# Altium PCB Cell Protection Board.PcbDoc
Units mm, origin at the board's own origin, x right, y up, seen from the top; angles counter-clockwise.
Board outline 55 x 160 mm, 2 copper layers (Top Layer, Bottom Layer); 73 components, 79 nets, 249 pads, 64 vias.
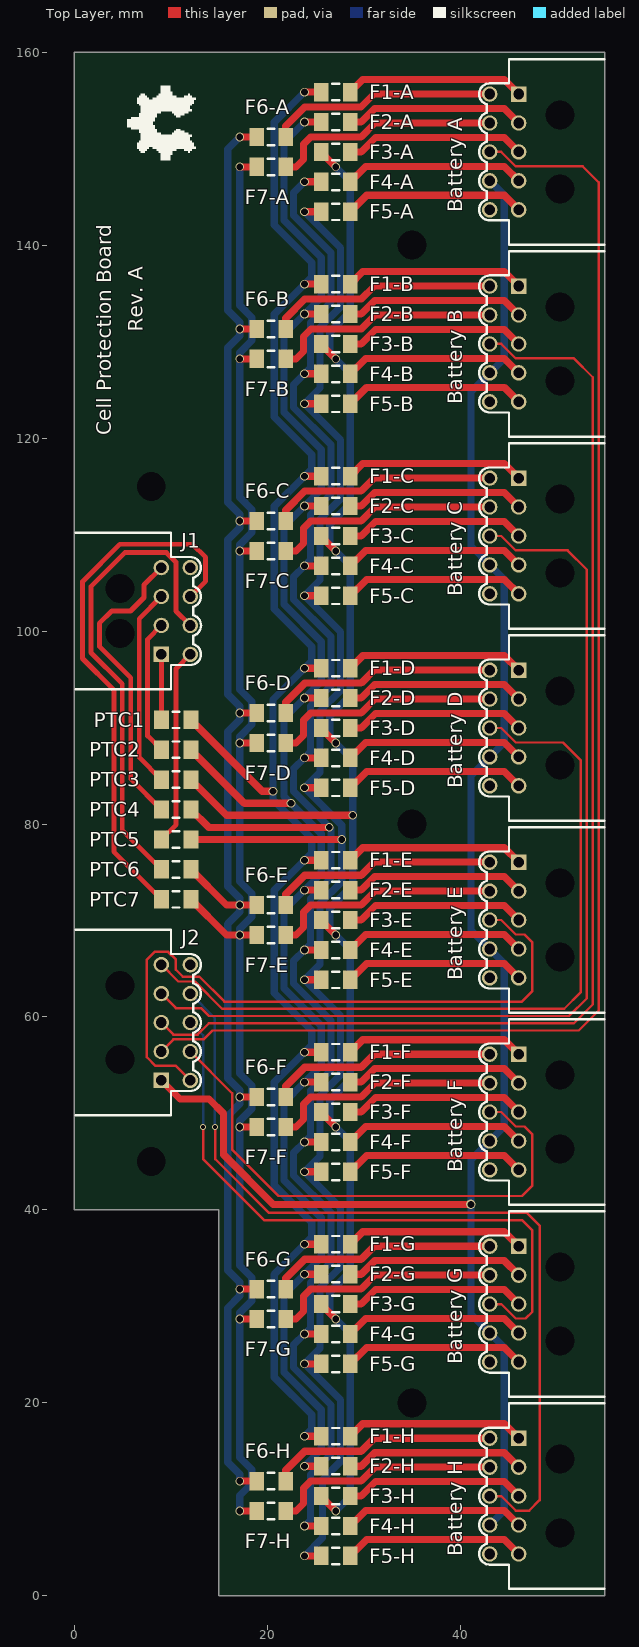
[diagram p0: Top Layer view]
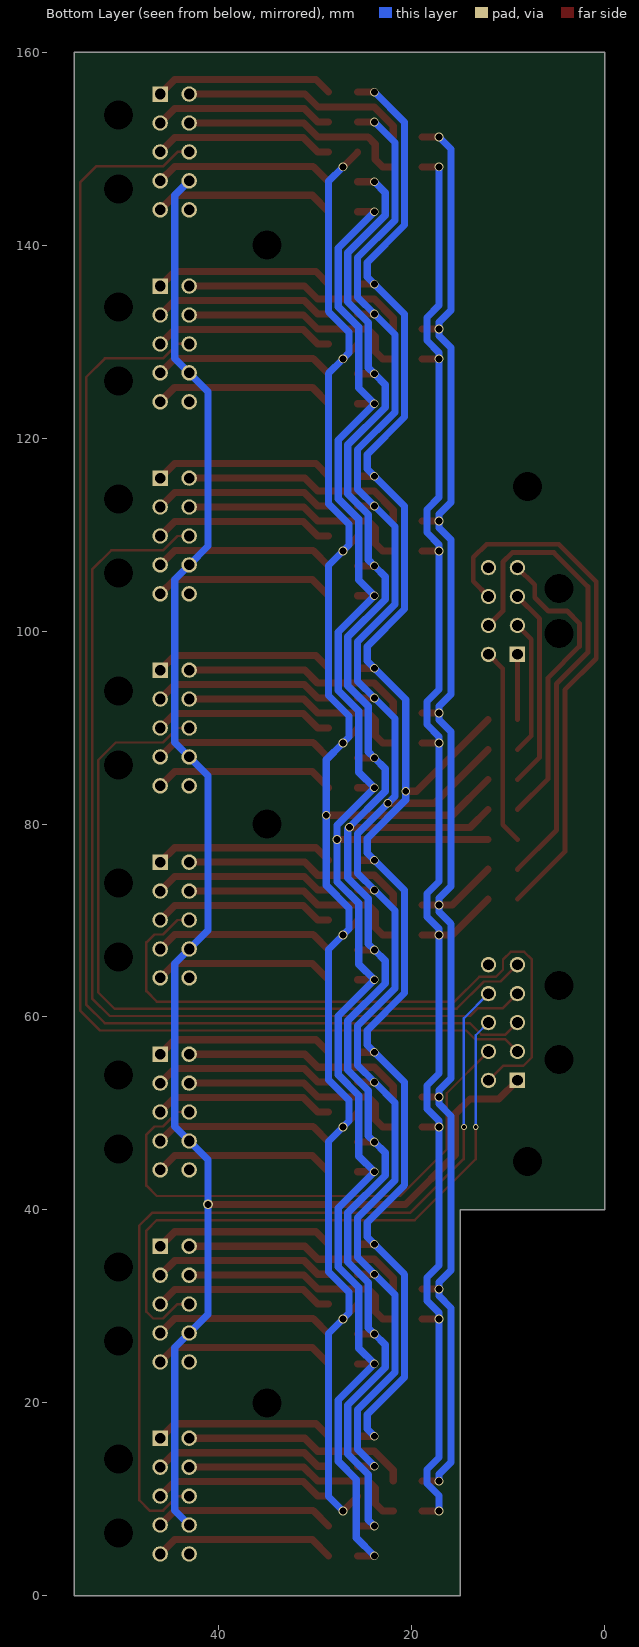
[diagram p1: Bottom Layer view, seen from below]

## Layer stack, top to bottom
Top Solder: solder mask 0.0102, Solder Resist, Dk 3.5
Top Layer: signal copper 0.0356
Dielectric 1: dielectric 0.32, FR-4, Dk 4.8
Bottom Layer: signal copper 0.0356
Bottom Solder: solder mask 0.0102, Solder Resist, Dk 3.5

## Board outline
0,40 15,40 15,0 55,0 55,160 0,160

## Design rules (kind name [scope] priority, off if disabled: settings)
Clearance [All] p1: gap=0.2
HoleSize [All] p1: absolutevalues=TRUE maxlimit=3 minlimit=0.025 maxpercent=80.000 minpercent=20.000
PolygonConnect [All] p1: connectstyle=Relief reliefconductorwidth=0.254 reliefentries=4 polygonreliefangle="90 Angle" airgapwidth=0.254
RoutingCorners [All] p1: cornerstyle=45-Degree minsetback=2.5 maxsetback=2.5
RoutingVias [All] p1: holewidth=0.4 width=0.6 viastyle="Through Hole" minholewidth=0.4 minwidth=0.6 maxholewidth=0.8 maxwidth=1
SilkToSolderMaskClearance [IsPad] p1: minsilkscreentomaskgap=0.15 clearancetoexposedcopper=TRUE
SolderMaskExpansion [All] p1: expansion=0.102
UnpouredPolygon [All] p1: allowunpoured=FALSE
Width [All] p1: maxlimit=0.75 minlimit=0.25 preferedwidth=0.25 minimp=50.000000 maximp=50.000000 favimp=50.000000
26 further rules are at their usual default settings.

## Components (designator, comment, footprint, x,y, rotation, side; value= is the part's Value field where it differs from the comment)
"Battery A" "Molex Micro-Fit 43045-1000" "MOLEX MICRO-FIT 43045-1000" 50.375,149.65 r90 top locked
"Battery B" "Molex Micro-Fit 43045-1000" "MOLEX MICRO-FIT 43045-1000" 50.375,129.75 r90 top locked
"Battery C" "Molex Micro-Fit 43045-1000" "MOLEX MICRO-FIT 43045-1000" 50.375,109.85 r90 top locked
"Battery D" "Molex Micro-Fit 43045-1000" "MOLEX MICRO-FIT 43045-1000" 50.375,89.95 r90 top locked
"Battery E" "Molex Micro-Fit 43045-1000" "MOLEX MICRO-FIT 43045-1000" 50.375,70.05 r90 top locked
"Battery F" "Molex Micro-Fit 43045-1000" "MOLEX MICRO-FIT 43045-1000" 50.375,50.15 r90 top locked
"Battery G" "Molex Micro-Fit 43045-1000" "MOLEX MICRO-FIT 43045-1000" 50.375,30.25 r90 top locked
"Battery H" "Molex Micro-Fit 43045-1000" "MOLEX MICRO-FIT 43045-1000" 50.375,10.35 r90 top locked
F1-A "" "Bel Fuse C1T Series (3216)" 27.125,155.85 r180 top locked
F1-B "" "Bel Fuse C1T Series (3216)" 27.125,135.95 r180 top locked
F1-C "" "Bel Fuse C1T Series (3216)" 27.125,116.05 r180 top locked
F1-D "" "Bel Fuse C1T Series (3216)" 27.125,96.15 r180 top locked
F1-E "" "Bel Fuse C1T Series (3216)" 27.125,76.25 r180 top locked
F1-F "" "Bel Fuse C1T Series (3216)" 27.125,56.35 r180 top locked
F1-G "" "Bel Fuse C1T Series (3216)" 27.125,36.45 r180 top locked
F1-H "" "Bel Fuse C1T Series (3216)" 27.125,16.55 r180 top locked
F2-A "" "Bel Fuse C1T Series (3216)" 27.125,152.75 r180 top locked
F2-B "" "Bel Fuse C1T Series (3216)" 27.125,132.85 r180 top locked
F2-C "" "Bel Fuse C1T Series (3216)" 27.125,112.95 r180 top locked
F2-D "" "Bel Fuse C1T Series (3216)" 27.125,93.05 r180 top locked
F2-E "" "Bel Fuse C1T Series (3216)" 27.125,73.15 r180 top locked
F2-F "" "Bel Fuse C1T Series (3216)" 27.125,53.25 r180 top locked
F2-G "" "Bel Fuse C1T Series (3216)" 27.125,33.35 r180 top locked
F2-H "" "Bel Fuse C1T Series (3216)" 27.125,13.45 r180 top locked
F3-A "" "Bel Fuse C1T Series (3216)" 27.125,149.65 r180 top locked
F3-B "" "Bel Fuse C1T Series (3216)" 27.125,129.75 r180 top locked
F3-C "" "Bel Fuse C1T Series (3216)" 27.125,109.85 r180 top locked
F3-D "" "Bel Fuse C1T Series (3216)" 27.125,89.95 r180 top locked
F3-E "" "Bel Fuse C1T Series (3216)" 27.125,70.05 r180 top locked
F3-F "" "Bel Fuse C1T Series (3216)" 27.125,50.15 r180 top locked
F3-G "" "Bel Fuse C1T Series (3216)" 27.125,30.25 r180 top locked
F3-H "" "Bel Fuse C1T Series (3216)" 27.125,10.35 r180 top locked
F4-A "" "Bel Fuse C1T Series (3216)" 27.125,146.55 r180 top locked
F4-B "" "Bel Fuse C1T Series (3216)" 27.125,126.65 r180 top locked
F4-C "" "Bel Fuse C1T Series (3216)" 27.125,106.75 r180 top locked
F4-D "" "Bel Fuse C1T Series (3216)" 27.125,86.85 r180 top locked
F4-E "" "Bel Fuse C1T Series (3216)" 27.125,66.95 r180 top locked
F4-F "" "Bel Fuse C1T Series (3216)" 27.125,47.05 r180 top locked
F4-G "" "Bel Fuse C1T Series (3216)" 27.125,27.15 r180 top locked
F4-H "" "Bel Fuse C1T Series (3216)" 27.125,7.25 r180 top locked
F5-A "" "Bel Fuse C1T Series (3216)" 27.125,143.45 r180 top locked
F5-B "" "Bel Fuse C1T Series (3216)" 27.125,123.55 r180 top locked
F5-C "" "Bel Fuse C1T Series (3216)" 27.125,103.65 r180 top locked
F5-D "" "Bel Fuse C1T Series (3216)" 27.125,83.75 r180 top locked
F5-E "" "Bel Fuse C1T Series (3216)" 27.125,63.85 r180 top locked
F5-F "" "Bel Fuse C1T Series (3216)" 27.125,43.95 r180 top locked
F5-G "" "Bel Fuse C1T Series (3216)" 27.125,24.05 r180 top locked
F5-H "" "Bel Fuse C1T Series (3216)" 27.125,4.15 r180 top locked
F6-A "" "Bel Fuse C1T Series (3216)" 20.425,151.2 r180 top locked
F6-B "" "Bel Fuse C1T Series (3216)" 20.425,131.3 r180 top locked
F6-C "" "Bel Fuse C1T Series (3216)" 20.425,111.4 r180 top locked
F6-D "" "Bel Fuse C1T Series (3216)" 20.425,91.5 r180 top locked
F6-E "" "Bel Fuse C1T Series (3216)" 20.425,71.6 r180 top locked
F6-F "" "Bel Fuse C1T Series (3216)" 20.425,51.7 r180 top locked
F6-G "" "Bel Fuse C1T Series (3216)" 20.425,31.8 r180 top locked
F6-H "" "Bel Fuse C1T Series (3216)" 20.425,11.9 r180 top locked
F7-A "" "Bel Fuse C1T Series (3216)" 20.425,148.1 r180 top locked
F7-B "" "Bel Fuse C1T Series (3216)" 20.425,128.2 r180 top locked
F7-C "" "Bel Fuse C1T Series (3216)" 20.425,108.3 r180 top locked
F7-D "" "Bel Fuse C1T Series (3216)" 20.425,88.4 r180 top locked
F7-E "" "Bel Fuse C1T Series (3216)" 20.425,68.5 r180 top locked
F7-F "" "Bel Fuse C1T Series (3216)" 20.425,48.6 r180 top locked
F7-G "" "Bel Fuse C1T Series (3216)" 20.425,28.7 r180 top locked
F7-H "" "Bel Fuse C1T Series (3216)" 20.425,8.8 r180 top locked
J1 "Molex Micro-Fit 43045-0800" "Molex Micro-Fit 43045-0800" 4.75,102.075 r270 top locked
J2 "Molex Micro-Fit 43045-1000" "MOLEX MICRO-FIT 43045-1000" 4.75,59.425 r270 top locked
PTC1 "" "Bel Fuse 0ZCJ Series (3216)" 10.575,90.8 r180 top locked
PTC2 "" "Bel Fuse 0ZCJ Series (3216)" 10.575,87.7 r180 top locked
PTC3 "" "Bel Fuse 0ZCJ Series (3216)" 10.575,84.6 r180 top locked
PTC4 "" "Bel Fuse 0ZCJ Series (3216)" 10.575,81.5 r180 top locked
PTC5 "" "Bel Fuse 0ZCJ Series (3216)" 10.575,78.4 r180 top locked
PTC6 "" "Bel Fuse 0ZCJ Series (3216)" 10.575,75.3 r180 top locked
PTC7 "" "Bel Fuse 0ZCJ Series (3216)" 10.575,72.2 r180 top locked

## Footprints (in the part's own frame and the unit in brackets; to place one, negate y for a bottom-side part, rotate by r counter-clockwise, add the part's x,y. Pads: shape width x height; smd on the part's side, far side on the other; paste and mask are expansions set on the pad)
"Bel Fuse 0ZCJ Series (3216)" [mm] "PTC Fuse"
  rect 1.55x1.9 smd: 1(-1.525,0) 2(1.525,0)
  silkscreen extent -0.35,-0.85 0.35,0.85, body extent -1.75,-0.9 1.75,0.9, height 0.85
"Bel Fuse C1T Series (3216)" [mm] "Slow Blow Chip Fuse"
  rect 1.5x1.9 smd: 1(-1.5,0) 2(1.5,0)
  silkscreen extent -0.35,-0.85 0.35,0.85, body extent -1.7,-0.89 1.7,0.89, height 0.83
"Molex Micro-Fit 43045-0800" [mm] "8-Pin Right-Angle Locking Male Header"
  rect 1.6x1.6 hole 1.1: 1(4.5,4.3)
  round 1.6 hole 1.1: 2(1.5,4.3) 3(-1.5,4.3) 4(-4.5,4.3) 5(4.5,7.3) 6(1.5,7.3) 7(-1.5,7.3) 8(-4.5,7.3)
  round 0 hole 3: ""(-2.35,0) ""(2.35,0)
  silkscreen extent -8.1,-4.6 8.1,8.41, body extent -8.08,-4.64 8.08,7.6, height 8.73
"MOLEX MICRO-FIT 43045-1000" [mm] "10-Pin Right-Angle Locking Male Header"
  rect 1.6x1.6 hole 1.1: 1(6,4.3)
  round 1.6 hole 1.1: 2(3,4.3) 3(0,4.3) 4(-3,4.3) 5(-6,4.3) 6(6,7.3) 7(3,7.3) 8(0,7.3) 9(-3,7.3) 10(-6,7.3)
  round 0 hole 3: ""(-3.85,0) ""(3.85,0)
  silkscreen extent -9.6,-4.6 9.6,8.4, body extent -9.57,-4.65 9.58,7.59, height 8.73

## Part data
"Battery A" "Battery B" "Battery C" "Battery D" "Battery E" "Battery F" "Battery G" "Battery H" J2: "10-Pin Right-Angle Locking Male Header"
F1-A F1-B F1-C F1-D F1-E F1-F F1-G F1-H F2-A F2-B F2-C F2-D F2-E F2-F F2-G F2-H F3-A F3-B F3-C F3-D F3-E F3-F F3-G F3-H F4-A F4-B F4-C F4-D F4-E F4-F F4-G F4-H F5-A F5-B F5-C F5-D F5-E F5-F F5-G F5-H F6-A F6-B F6-C F6-D F6-E F6-F F6-G F6-H F7-A F7-B F7-C F7-D F7-E F7-F F7-G F7-H PTC1 PTC2 PTC3 PTC4 PTC5 PTC6 PTC7: library part "Fuse 1", "Fuse"
J1: "8-Pin Right-Angle Locking Male Header"

## Free pads (board coordinates)
  round 0 hole 3: ""(8,45) ""(8,115) ""(35,20) ""(35,80) ""(35,140)

## Via types
v1: diameter 0.9, hole 0.7, Top Layer to Bottom Layer, tented both sides, 61 vias
v2: diameter 0.6, hole 0.4, Top Layer to Bottom Layer, tented both sides, 2 vias
v3: diameter 1, hole 0.7, Top Layer to Bottom Layer, tented both sides, 1 vias

## Nets (pads, with @x,y where several pads share a name; then routed paths per layer and width w, separated by ;. In a path a pad name is that pad's centre, name@x,y a point inside that pad or via, vN(x,y) a via of type N, cw(c..) or ccw(c..) an arc to the next point about the centre after c; other vN are vias at no path point)
"NetBattery A_1": "Battery A.1" F1-A.1 | length 18.6
  Top Layer w0.75: F1-A.1 29.925,157.15 44.575,157.15 46.075,155.65
"NetBattery A_2": "Battery A.2" F2-A.1 | length 18.7
  Top Layer w0.75: F2-A.1 29.75,152.75 31.15,154.15 44.575,154.15 46.075,152.65
"NetBattery A_3": "Battery A.3" F3-A.1 | length 18.7
  Top Layer w0.75: F3-A.1 29.75,149.65 31.25,151.15 44.575,151.15 46.075,149.65
"NetBattery A_4": "Battery A.4" F4-A.1 | length 18.7
  Top Layer w0.75: F4-A.1 30.225,148.15 44.575,148.15 46.075,146.65
"NetBattery A_5": "Battery A.5" F5-A.1 | length 18.8
  Top Layer w0.75: F5-A.1 30.325,145.15 44.575,145.15 46.075,143.65
"NetBattery A_6": "Battery A.6" F6-A.1 | length 23.7
  Top Layer w0.75: F6-A.1 21.925,152.325 23.9,154.3 29.725,154.3 31.075,155.65 43.075,155.65
"NetBattery A_7": "Battery A.7" F7-A.1 | length 24
  Top Layer w0.75: F7-A.1 23,148.1 23.775,148.875 23.775,150.45 24.525,151.2 29.75,151.2 31.2,152.65 43.075,152.65
"NetBattery A_8": "Battery A.8" J2.2 | length 145.5
  Top Layer w0.25: J2.2 10.3,57.675 13.425,57.675 14.35,58.6 52.3,58.6 54.375,60.675 54.375,146.5 52.725,148.15 45.775,148.15 44.275,149.65 43.075,149.65
"NetBattery A_9": "Battery A.9" "Battery B.9" "Battery C.9" "Battery D.9" "Battery E.9" "Battery F.9" "Battery G.9" "Battery H.9" J2.1 | length 189
  Top Layer w0.75: J2.1 10.975,51.5 13.975,51.5 15.5,49.975 15.5,45.725 20.65,40.575 v3(41.125,40.575)
  Bottom Layer w0.75: 43.075,7.35 44.575,8.85 44.575,25.75 43.075,27.25 41.125,29.2 41.125,40.55 41.125,45.2 43.075,47.15 44.575,48.65 44.575,65.55 43.075,67.05 41.125,69 41.125,85 43.075,86.95 44.575,88.45 44.575,105.35 43.075,106.85 41.125,108.8 41.125,124.8 43.075,126.75 44.575,128.25 44.575,145.15 43.075,146.65
"NetBattery B_1": "Battery B.1" F1-B.1 | length 18.6
  Top Layer w0.75: F1-B.1 29.925,137.25 44.575,137.25 46.075,135.75
"NetBattery B_2": "Battery B.2" F2-B.1 | length 18.7
  Top Layer w0.75: F2-B.1 29.75,132.85 31.15,134.25 44.575,134.25 46.075,132.75
"NetBattery B_3": "Battery B.3" F3-B.1 | length 18.7
  Top Layer w0.75: F3-B.1 29.75,129.75 31.25,131.25 44.575,131.25 46.075,129.75
"NetBattery B_4": "Battery B.4" F4-B.1 | length 18.7
  Top Layer w0.75: F4-B.1 30.225,128.25 44.575,128.25 46.075,126.75
"NetBattery B_5": "Battery B.5" F5-B.1 | length 18.8
  Top Layer w0.75: F5-B.1 30.325,125.25 44.575,125.25 46.075,123.75
"NetBattery B_6": "Battery B.6" F6-B.1 | length 23.7
  Top Layer w0.75: F6-B.1 21.925,132.425 23.9,134.4 29.775,134.4 31.125,135.75 43.075,135.75
"NetBattery B_7": "Battery B.7" F7-B.1 | length 23.9
  Top Layer w0.75: F7-B.1 23,128.2 23.775,128.975 23.775,130.525 24.55,131.3 29.775,131.3 31.225,132.75 43.075,132.75
"NetBattery B_8": "Battery B.8" J2.3 | length 123.6
  Top Layer w0.25: J2.3 10.3,58.175 12.8,58.175 13.975,59.35 51.8,59.35 53.75,61.3 53.75,126.3 51.8,128.25 45.775,128.25 44.275,129.75 43.075,129.75
"NetBattery C_1": "Battery C.1" F1-C.1 | length 18.6
  Top Layer w0.75: F1-C.1 29.925,117.35 44.575,117.35 46.075,115.85
"NetBattery C_2": "Battery C.2" F2-C.1 | length 18.7
  Top Layer w0.75: F2-C.1 29.75,112.95 31.15,114.35 44.575,114.35 46.075,112.85
"NetBattery C_3": "Battery C.3" F3-C.1 | length 18.7
  Top Layer w0.75: F3-C.1 29.75,109.85 31.25,111.35 44.575,111.35 46.075,109.85
"NetBattery C_4": "Battery C.4" F4-C.1 | length 18.7
  Top Layer w0.75: F4-C.1 30.225,108.35 44.575,108.35 46.075,106.85
"NetBattery C_5": "Battery C.5" F5-C.1 | length 18.8
  Top Layer w0.75: F5-C.1 30.325,105.35 44.575,105.35 46.075,103.85
"NetBattery C_6": "Battery C.6" F6-C.1 | length 23.7
  Top Layer w0.75: F6-C.1 21.925,112.525 23.9,114.5 29.75,114.5 31.1,115.85 43.075,115.85
"NetBattery C_7": "Battery C.7" F7-C.1 | length 24
  Top Layer w0.75: F7-C.1 23,108.3 23.775,109.075 23.775,110.65 24.525,111.4 29.75,111.4 31.2,112.85 43.075,112.85
"NetBattery C_8": "Battery C.8" J2.4 | length 101.7
  Top Layer w0.25: J2.4 10.55,60.925 13.15,60.925 13.975,60.1 51.3,60.1 53.125,61.925 53.125,106.375 51.15,108.35 45.775,108.35 44.275,109.85 43.075,109.85
"NetBattery D_1": "Battery D.1" F1-D.1 | length 18.6
  Top Layer w0.75: F1-D.1 29.925,97.45 44.575,97.45 46.075,95.95
"NetBattery D_2": "Battery D.2" F2-D.1 | length 18.7
  Top Layer w0.75: F2-D.1 29.75,93.05 31.15,94.45 44.575,94.45 46.075,92.95
"NetBattery D_3": "Battery D.3" F3-D.1 | length 18.7
  Top Layer w0.75: F3-D.1 29.75,89.95 31.25,91.45 44.575,91.45 46.075,89.95
"NetBattery D_4": "Battery D.4" F4-D.1 | length 18.7
  Top Layer w0.75: F4-D.1 30.225,88.45 44.575,88.45 46.075,86.95
"NetBattery D_5": "Battery D.5" F5-D.1 | length 18.8
  Top Layer w0.75: F5-D.1 30.325,85.45 44.575,85.45 46.075,83.95
"NetBattery D_6": "Battery D.6" F6-D.1 | length 23.7
  Top Layer w0.75: F6-D.1 21.925,92.625 23.9,94.6 29.75,94.6 31.1,95.95 43.075,95.95
"NetBattery D_7": "Battery D.7" F7-D.1 | length 24
  Top Layer w0.75: F7-D.1 23,88.4 23.775,89.175 23.775,90.75 24.525,91.5 29.75,91.5 31.2,92.95 43.075,92.95
"NetBattery D_8": "Battery D.8" J2.5 | length 80.9
  Top Layer w0.25: J2.5 10.8,63.675 12.525,63.675 15.35,60.85 50.8,60.85 52.5,62.55 52.5,86.627 50.677,88.45 45.775,88.45 44.275,89.95 43.075,89.95
"NetBattery E_1": "Battery E.1" F1-E.1 | length 18.6
  Top Layer w0.75: F1-E.1 29.925,77.55 44.575,77.55 46.075,76.05
"NetBattery E_2": "Battery E.2" F2-E.1 | length 18.7
  Top Layer w0.75: F2-E.1 29.75,73.15 31.15,74.55 44.575,74.55 46.075,73.05
"NetBattery E_3": "Battery E.3" F3-E.1 | length 18.7
  Top Layer w0.75: F3-E.1 29.75,70.05 31.25,71.55 44.575,71.55 46.075,70.05
"NetBattery E_4": "Battery E.4" F4-E.1 | length 18.7
  Top Layer w0.75: F4-E.1 30.225,68.55 44.575,68.55 46.075,67.05
"NetBattery E_5": "Battery E.5" F5-E.1 | length 18.8
  Top Layer w0.75: F5-E.1 30.325,65.55 44.575,65.55 46.075,64.05
"NetBattery E_6": "Battery E.6" F6-E.1 | length 23.7
  Top Layer w0.75: F6-E.1 21.925,72.725 23.9,74.7 29.75,74.7 31.1,76.05 43.075,76.05
"NetBattery E_7": "Battery E.7" F7-E.1 | length 24
  Top Layer w0.75: F7-E.1 23,68.5 23.775,69.275 23.775,70.85 24.525,71.6 29.75,71.6 31.2,73.05 43.075,73.05
"NetBattery E_8": "Battery E.8" J2.6 | length 69.5
  Top Layer w0.25: J2.6 10.55,54.925 8.45,54.925 7.55,55.825 7.55,65.95 8.35,66.75 9.75,66.75 10.55,65.95 10.55,64.9 11.275,64.175 13,64.175 15.575,61.6 46.425,61.6 47.5,62.675 47.5,67.725 46.675,68.55 45.775,68.55 44.275,70.05 43.075,70.05
"NetBattery F_1": "Battery F.1" F1-F.1 | length 18.6
  Top Layer w0.75: F1-F.1 29.925,57.65 44.575,57.65 46.075,56.15
"NetBattery F_2": "Battery F.2" F2-F.1 | length 18.7
  Top Layer w0.75: F2-F.1 29.75,53.25 31.15,54.65 44.575,54.65 46.075,53.15
"NetBattery F_3": "Battery F.3" F3-F.1 | length 18.7
  Top Layer w0.75: F3-F.1 29.75,50.15 31.25,51.65 44.575,51.65 46.075,50.15
"NetBattery F_4": "Battery F.4" F4-F.1 | length 18.7
  Top Layer w0.75: F4-F.1 30.225,48.65 44.575,48.65 46.075,47.15
"NetBattery F_5": "Battery F.5" F5-F.1 | length 18.8
  Top Layer w0.75: F5-F.1 30.325,45.65 44.575,45.65 46.075,44.15
"NetBattery F_6": "Battery F.6" F6-F.1 | length 23.7
  Top Layer w0.75: F6-F.1 21.925,52.825 23.9,54.8 29.75,54.8 31.1,56.15 43.075,56.15
"NetBattery F_7": "Battery F.7" F7-F.1 | length 24
  Top Layer w0.75: F7-F.1 23,48.6 23.775,49.375 23.775,50.95 24.525,51.7 29.75,51.7 31.2,53.15 43.075,53.15
"NetBattery F_8": "Battery F.8" J2.7 | length 56.2
  Top Layer w0.25: J2.7 16.375,52.1 16.375,46.275 21.2,41.45 46.425,41.45 47.5,42.525 47.5,47.825 46.675,48.65 45.775,48.65 44.275,50.15 43.075,50.15
"NetBattery G_1": "Battery G.1" F1-G.1 | length 18.6
  Top Layer w0.75: F1-G.1 29.925,37.75 44.575,37.75 46.075,36.25
"NetBattery G_2": "Battery G.2" F2-G.1 | length 18.7
  Top Layer w0.75: F2-G.1 29.75,33.35 31.15,34.75 44.575,34.75 46.075,33.25
"NetBattery G_3": "Battery G.3" F3-G.1 | length 18.7
  Top Layer w0.75: F3-G.1 29.75,30.25 31.25,31.75 44.575,31.75 46.075,30.25
"NetBattery G_4": "Battery G.4" F4-G.1 | length 18.7
  Top Layer w0.75: F4-G.1 30.225,28.75 44.575,28.75 46.075,27.25
"NetBattery G_5": "Battery G.5" F5-G.1 | length 18.8
  Top Layer w0.75: F5-G.1 30.325,25.75 44.575,25.75 46.075,24.25
"NetBattery G_6": "Battery G.6" F6-G.1 | length 23.7
  Top Layer w0.75: F6-G.1 21.925,32.925 23.9,34.9 29.75,34.9 31.1,36.25 43.075,36.25
"NetBattery G_7": "Battery G.7" F7-G.1 | length 24
  Top Layer w0.75: F7-G.1 23,28.7 23.775,29.475 23.775,31.05 24.525,31.8 29.75,31.8 31.2,33.25 43.075,33.25
"NetBattery G_8": "Battery G.8" J2.8 | length 65.7
  Top Layer w0.25: v2(13.375,48.6) 13.375,45.275 19.7,38.95 46.425,38.95 47.5,37.875 47.5,29.45 46.8,28.75 45.775,28.75 44.275,30.25 43.075,30.25
  Bottom Layer w0.25: J2.8 13.375,58.1 v2(13.375,48.6)
"NetBattery H_1": "Battery H.1" F1-H.1 | length 18.6
  Top Layer w0.75: F1-H.1 29.925,17.85 44.575,17.85 46.075,16.35
"NetBattery H_2": "Battery H.2" F2-H.1 | length 18.7
  Top Layer w0.75: F2-H.1 29.75,13.45 31.15,14.85 44.575,14.85 46.075,13.35
"NetBattery H_3": "Battery H.3" F3-H.1 | length 18.7
  Top Layer w0.75: F3-H.1 29.75,10.35 31.25,11.85 44.575,11.85 46.075,10.35
"NetBattery H_4": "Battery H.4" F4-H.1 | length 18.7
  Top Layer w0.75: F4-H.1 30.225,8.85 44.575,8.85 46.075,7.35
"NetBattery H_5": "Battery H.5" F5-H.1 | length 18.8
  Top Layer w0.75: F5-H.1 30.325,5.85 44.575,5.85 46.075,4.35
"NetBattery H_6": "Battery H.6" F6-H.1 | length 23.7
  Top Layer w0.75: F6-H.1 21.925,13.025 23.9,15 29.75,15 31.1,16.35 43.075,16.35
"NetBattery H_7": "Battery H.7" F7-H.1 | length 24
  Top Layer w0.75: F7-H.1 23,8.8 23.775,9.575 23.775,11.15 24.525,11.9 29.75,11.9 31.2,13.35 43.075,13.35
"NetBattery H_8": "Battery H.8" J2.9 | length 89.4
  Top Layer w0.25: v2@14.625,48.575 14.625,45.275 20.2,39.7 46.925,39.7 48.25,38.375 48.25,9.925 47.175,8.85 45.775,8.85 44.275,10.35 43.075,10.35
  Bottom Layer w0.25: J2.9 14.6,59.875 v2(14.6,48.6)
NetF1-A_2: F1-A.2 F1-B.2 F1-C.2 F1-D.2 F1-E.2 F1-F.2 F1-G.2 F1-H.2 PTC1.1 | length 187.5
  Top Layer w0.75: PTC1.1 19.5,83.4 v1(20.625,83.4) ; v1(23.875,16.55) F1-H.2 ; v1(23.875,36.45) F1-G.2 ; v1(23.875,56.35) F1-F.2 ; v1(23.875,76.25) F1-E.2 ; v1(23.875,96.15) F1-D.2 ; v1(23.875,116.05) F1-C.2 ; v1(23.875,135.95) F1-B.2 ; v1(23.875,155.85) F1-A.2
  Bottom Layer w0.75: v1(23.875,16.55) 24.625,17.3 24.625,18.8 20.75,22.675 20.75,33.325 v1(23.875,36.45) 24.625,37.2 24.625,38.7 20.75,42.575 20.75,53.225 v1(23.875,56.35) 24.625,57.1 24.625,58.6 20.75,62.475 20.75,73.125 v1(23.875,76.25) 24.625,77 24.625,78.5 20.625,82.5 20.625,83.775 20.625,92.9 v1(23.875,96.15) 24.625,96.9 24.625,98.4 20.75,102.275 20.75,112.925 v1(23.875,116.05) 24.625,116.8 24.625,118.3 20.75,122.175 20.75,132.825 v1(23.875,135.95) 24.625,136.7 24.625,138.2 20.75,142.075 20.75,152.725 v1(23.875,155.85)
NetF2-A_2: F2-A.2 F2-B.2 F2-C.2 F2-D.2 F2-E.2 F2-F.2 F2-G.2 F2-H.2 PTC2.1 | length 188.4
  Top Layer w0.75: PTC2.1 17.65,82.15 v1(22.475,82.15) ; v1(23.875,13.45) F2-H.2 ; v1(23.875,33.35) F2-G.2 ; v1(23.875,53.25) F2-F.2 ; v1(23.875,73.15) F2-E.2 ; v1(23.875,93.05) F2-D.2 ; v1(23.875,112.95) F2-C.2 ; v1(23.875,132.85) F2-B.2 ; v1(23.875,152.75) F2-A.2
  Bottom Layer w0.75: v1(23.875,13.45) 25.625,15.2 25.625,19.3 21.75,23.175 21.75,31.225 v1(23.875,33.35) 25.625,35.1 25.625,39.2 21.75,43.075 21.75,51.125 v1(23.875,53.25) 25.625,55 25.625,59.1 21.75,62.975 21.75,71.025 v1(23.875,73.15) 25.625,74.9 25.625,79 21.75,82.875 21.75,90.925 v1(23.875,93.05) 25.625,94.8 25.625,98.9 21.75,102.775 21.75,110.825 v1(23.875,112.95) 25.625,114.7 25.625,118.8 21.75,122.675 21.75,130.725 v1(23.875,132.85) 25.625,134.6 25.625,138.7 21.75,142.575 21.75,150.625 v1(23.875,152.75)
NetF3-A_2: F3-A.2 F3-B.2 F3-C.2 F3-D.2 F3-E.2 F3-F.2 F3-G.2 F3-H.2 PTC3.1 | length 187
  Top Layer w0.75: PTC3.1 15.8,80.9 v1(28.875,80.9) ; F3-H.2 25.625,10.3 v1(27.125,8.8) ; F3-G.2 25.625,30.2 v1(27.125,28.7) ; F3-F.2 25.625,50.1 v1(27.125,48.6) ; F3-E.2 25.625,70 v1(27.125,68.5) ; F3-D.2 25.625,89.9 v1(27.125,88.4) ; F3-C.2 25.625,109.8 v1(27.125,108.3) ; F3-B.2 25.625,129.7 v1(27.125,128.2) ; F3-A.2 25.625,149.6 v1(27.125,148.1)
  Bottom Layer w0.75: v1(27.125,8.8) 28.625,10.3 28.625,27.2 v1(27.125,28.7) 26.5,29.325 26.5,31.475 28.625,33.6 28.625,47.1 v1(27.125,48.6) 26.5,49.225 26.5,51.375 28.625,53.5 28.625,67 v1(27.125,68.5) 26.5,69.125 26.5,71.275 28.875,73.65 28.875,81.275 28.875,86.65 v1(27.125,88.4) 26.5,89.025 26.5,91.2 28.625,93.325 28.625,106.8 v1(27.125,108.3) 26.5,108.925 26.5,111.075 28.625,113.2 28.625,126.7 v1(27.125,128.2) 26.5,128.825 26.5,130.975 28.625,133.1 28.625,146.6 v1(27.125,148.1)
NetF4-A_2: F4-A.2 F4-B.2 F4-C.2 F4-D.2 F4-E.2 F4-F.2 F4-G.2 F4-H.2 PTC4.1 | length 190.9
  Top Layer w0.75: PTC4.1 13.95,79.65 v1@26.425,79.65 ; v1(23.875,7.25) F4-H.2 ; v1(23.875,27.15) F4-G.2 ; v1(23.875,47.05) F4-F.2 ; v1(23.875,66.95) F4-E.2 ; v1(23.875,86.85) F4-D.2 ; v1(23.875,106.75) F4-C.2 ; v1(23.875,126.65) F4-B.2 ; v1(23.875,146.55) F4-A.2
  Bottom Layer w0.75: v1(23.875,7.25) 24.5,7.875 24.5,12.575 26.625,14.7 26.625,19.8 22.75,23.675 22.75,26.025 v1(23.875,27.15) 24.5,27.775 24.5,32.475 26.625,34.6 26.625,39.7 22.75,43.575 22.75,45.925 v1(23.875,47.05) 24.5,47.675 24.5,52.375 26.625,54.5 26.625,59.6 22.75,63.475 22.75,65.825 v1(23.875,66.95) 24.5,67.575 24.5,72.275 26.625,74.4 26.625,79.5 v1(26.45,79.675) 26.45,79.68 22.955,83.175 22.95,83.175 22.75,83.375 22.75,85.725 v1(23.875,86.85) 24.5,87.475 24.5,92.2 26.625,94.325 26.625,99.4 22.75,103.275 22.75,105.625 v1(23.875,106.75) 24.5,107.375 24.5,112.075 26.625,114.2 26.625,119.3 22.75,123.175 22.75,125.525 v1(23.875,126.65) 24.5,127.275 24.5,131.975 26.625,134.1 26.625,139.2 22.75,143.075 22.75,145.425 v1(23.875,146.55)
NetF5-A_2: F5-A.2 F5-B.2 F5-C.2 F5-D.2 F5-E.2 F5-F.2 F5-G.2 F5-H.2 PTC5.1 | length 190.8
  Top Layer w0.75: PTC5.1 v1(27.75,78.4) ; v1(23.875,4.15) F5-H.2 ; v1(23.875,24.05) F5-G.2 ; v1(23.875,43.95) F5-F.2 ; v1(23.875,63.85) F5-E.2 ; v1(23.875,83.75) F5-D.2 ; v1(23.875,103.65) F5-C.2 ; v1(23.875,123.55) F5-B.2 ; v1(23.875,143.45) F5-A.2
  Bottom Layer w0.75: v1(23.875,4.15) 25.75,6.025 25.75,12.075 27.625,13.95 27.625,20.3 v1(23.875,24.05) 25.5,25.675 25.5,31.975 27.625,34.1 27.625,40.2 v1(23.875,43.95) 25.5,45.575 25.5,51.875 27.625,54 27.625,60.1 v1(23.875,63.85) 25.5,65.475 25.5,71.775 27.75,74.025 v1(27.75,78.4) 27.75,79.875 v1(23.875,83.75) 25.5,85.375 25.5,91.7 27.625,93.825 27.625,99.9 v1(23.875,103.65) 25.5,105.275 25.5,111.575 27.625,113.7 27.625,119.8 v1(23.875,123.55) 25.5,125.175 25.5,131.475 27.625,133.6 27.625,139.7 v1(23.875,143.45)
NetF6-A_2: F6-A.2 F6-B.2 F6-C.2 F6-D.2 F6-E.2 F6-F.2 F6-G.2 F6-H.2 PTC6.1 | length 167.2
  Top Layer w0.75: PTC6.1 15.8,71.6 v1(17.175,71.6) F6-E.2 ; v1(17.175,11.9) F6-H.2 ; v1(17.175,31.8) F6-G.2 ; v1(17.175,51.7) F6-F.2 ; v1(17.175,91.5) F6-D.2 ; v1(17.175,111.4) F6-C.2 ; v1(17.175,131.3) F6-B.2 ; v1(17.175,151.2) F6-A.2
  Bottom Layer w0.75: v1(17.175,11.9) 17.175,12.6 15.925,13.85 15.925,29.85 17.175,31.1 v1(17.175,31.8) 17.175,32.5 15.925,33.75 15.925,49.75 17.175,51 v1(17.175,51.7) 17.175,52.4 15.925,53.65 15.925,69.65 17.175,70.9 v1(17.175,71.6) 17.175,72.3 15.925,73.55 15.925,89.55 17.175,90.8 v1(17.175,91.5) 17.175,92.2 15.925,93.45 15.925,109.45 17.175,110.7 v1(17.175,111.4) 17.175,112.1 15.925,113.35 15.925,129.35 17.175,130.6 v1(17.175,131.3) 17.175,132 15.925,133.25 15.925,149.95 v1(17.175,151.2)
NetF7-A_2: F7-A.2 F7-B.2 F7-C.2 F7-D.2 F7-E.2 F7-F.2 F7-G.2 F7-H.2 PTC7.1 | length 167.2
  Top Layer w0.75: PTC7.1 15.8,68.5 v1(17.175,68.5) F7-E.2 ; v1(17.175,8.8) F7-H.2 ; v1(17.175,28.7) F7-G.2 ; v1(17.175,48.6) F7-F.2 ; v1(17.175,88.4) F7-D.2 ; v1(17.175,108.3) F7-C.2 ; v1(17.175,128.2) F7-B.2 ; v1(17.175,148.1) F7-A.2
  Bottom Layer w0.75: v1(17.175,8.8) 17.175,10.4 18.425,11.65 18.425,13.1 17.175,14.35 v1(17.175,28.7) 17.175,29.35 18.425,30.6 18.425,33 17.175,34.25 v1(17.175,48.6) 17.175,49.25 18.425,50.5 18.425,52.9 17.175,54.15 v1(17.175,68.5) 17.175,69.15 18.425,70.4 18.425,72.8 17.175,74.05 v1(17.175,88.4) 17.175,89.05 18.425,90.3 18.425,92.7 17.175,93.95 v1(17.175,108.3) 17.175,108.95 18.425,110.2 18.425,112.6 17.175,113.85 v1(17.175,128.2) 17.175,128.85 18.425,130.1 18.425,132.5 17.175,133.75 v1(17.175,148.1)
NetJ1_1: J1.1 PTC1.2 | length 6.8
  Top Layer w0.5: PTC1.2 J1.1
NetJ1_2: J1.2 PTC2.2 | length 14.1
  Top Layer w0.5: PTC2.2 7.625,89.125 7.625,99.15 J1.2
NetJ1_3: J1.3 PTC3.2 | length 20.9
  Top Layer w0.5: PTC3.2 6.75,86.9 6.75,101.275 J1.3
NetJ1_4: J1.4 PTC4.2 | length 31.5
  Top Layer w0.5: PTC4.2 5.875,84.675 5.875,95.15 2.625,98.4 2.625,100.8 3.9,102.075 5.85,102.075 7.25,103.475 7.25,104.775 J1.4
NetJ1_5: J1.5 PTC5.2 | length 20.4
  Top Layer w0.5: PTC5.2 10.575,79.925 10.575,96.1 J1.5
NetJ1_6: J1.6 PTC6.2 | length 50.2
  Top Layer w0.5: PTC6.2 5,79.35 5,94.525 1.75,97.775 1.75,104.6 5.275,108.125 9.575,108.125 10.55,107.15 10.55,102.075 J1.6
NetJ1_7: J1.7 PTC7.2 | length 55.9
  Top Layer w0.5: PTC7.2 4.125,77.125 4.125,93.9 0.875,97.15 0.875,105.125 4.75,109 12.25,109 13.625,107.625 13.625,105.15 J1.7
pads on no net: "Battery A.10" "Battery A." "Battery B.10" "Battery B." "Battery C.10" "Battery C." "Battery D.10" "Battery D." "Battery E.10" "Battery E." "Battery F.10" "Battery F." "Battery G.10" "Battery G." "Battery H.10" "Battery H." J1. J1.8 J2. J2.10

## Silkscreen, mask and mechanical layers (free items; w line width, h text height)
Top Overlay:
  region: 5.919,153.041 5.919,153.244 6.731,153.244 6.731,153.651 6.935,153.651 6.935,154.463 6.731,154.463 6.731,154.667 6.528,154.667 6.528,155.276 6.731,155.276 6.731,155.479 6.935,155.479 6.935,155.683 7.341,155.683 7.341,155.479 7.544,155.479 7.544,155.276 7.747,155.276 7.747,155.073 8.154,155.073 8.154,155.276 8.56,155.276 8.56,155.479 8.763,155.479 8.763,155.683 8.967,155.683 8.967,156.495 9.983,156.495 9.983,155.886 10.186,155.886 10.186,155.479 10.592,155.479 10.592,155.276 11.405,155.276 11.405,155.479 11.811,155.479 11.811,155.683 12.015,155.683 12.015,155.479 12.218,155.479 12.218,155.276 12.624,155.276 12.624,155.073 12.421,155.073 12.421,154.667 12.218,154.667 12.218,154.463 12.015,154.463 12.015,154.057 12.218,154.057 12.218,153.854 11.811,153.854 11.811,153.651 11.405,153.651 11.405,153.447 10.999,153.447 10.999,153.244 10.592,153.244 10.592,153.447 10.389,153.447 10.389,153.651 10.186,153.651 10.186,153.854 8.967,153.854 8.967,153.651 8.56,153.651 8.56,153.244 8.357,153.244 8.357,152.838 8.154,152.838 8.154,152.431 8.357,152.431 8.357,152.025 8.56,152.025 8.56,151.619 8.967,151.619 8.967,151.415 10.186,151.415 10.186,151.619 10.389,151.619 10.389,151.822 10.592,151.822 10.592,152.025 10.999,152.025 10.999,151.822 11.405,151.822 11.405,151.619 11.811,151.619 11.811,151.415 12.218,151.415 12.218,151.212 12.015,151.212 12.015,150.806 12.218,150.806 12.218,150.603 12.421,150.603 12.421,150.196 12.624,150.196 12.624,149.993 12.218,149.993 12.218,149.79 12.015,149.79 12.015,149.587 11.811,149.587 11.811,149.79 11.405,149.79 11.405,149.993 10.592,149.993 10.592,149.79 10.186,149.79 10.186,149.383 9.983,149.383 9.983,148.774 8.967,148.774 8.967,149.587 8.763,149.587 8.763,149.79 8.56,149.79 8.56,149.993 8.154,149.993 8.154,150.196 7.747,150.196 7.747,149.993 7.544,149.993 7.544,149.79 7.341,149.79 7.341,149.587 6.935,149.587 6.935,149.79 6.731,149.79 6.731,149.993 6.528,149.993 6.528,150.603 6.731,150.603 6.731,150.806 6.935,150.806 6.935,151.619 6.731,151.619 6.731,152.025 5.919,152.025 5.919,152.228 5.512,152.228 5.512,153.041
  text "Rev. A" at 7.125,131.025 h1.5 r90
  text "Cell Protection Board" at 3.875,120.275 h1.5 r90
Mechanical 1:
  the board outline again, w0.25